# Altium PCB PCB_CPU_1.PcbDoc
Units mm, origin at the board's own origin, x right, y up, seen from the top; angles counter-clockwise.
Board outline 195 x 54.5 mm, 2 copper layers (Top Layer, Bottom Layer); 53 components, 42 nets, 196 pads, 3 vias.
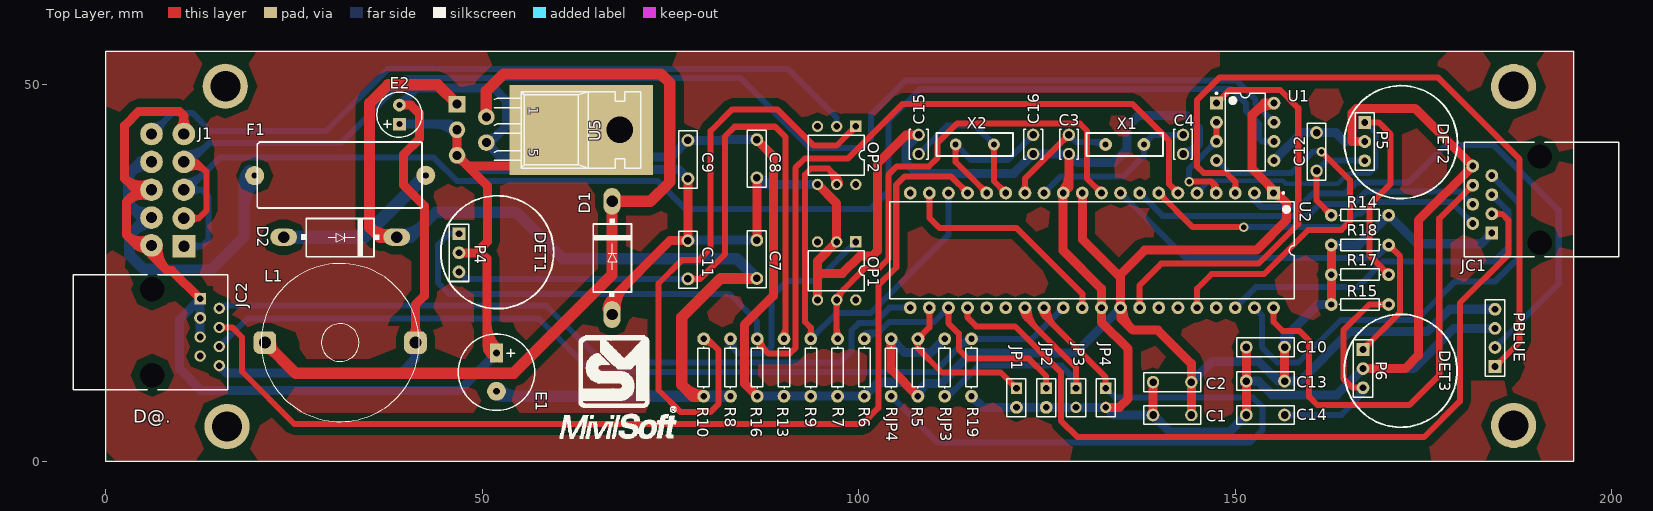
[diagram p0: Top Layer view]
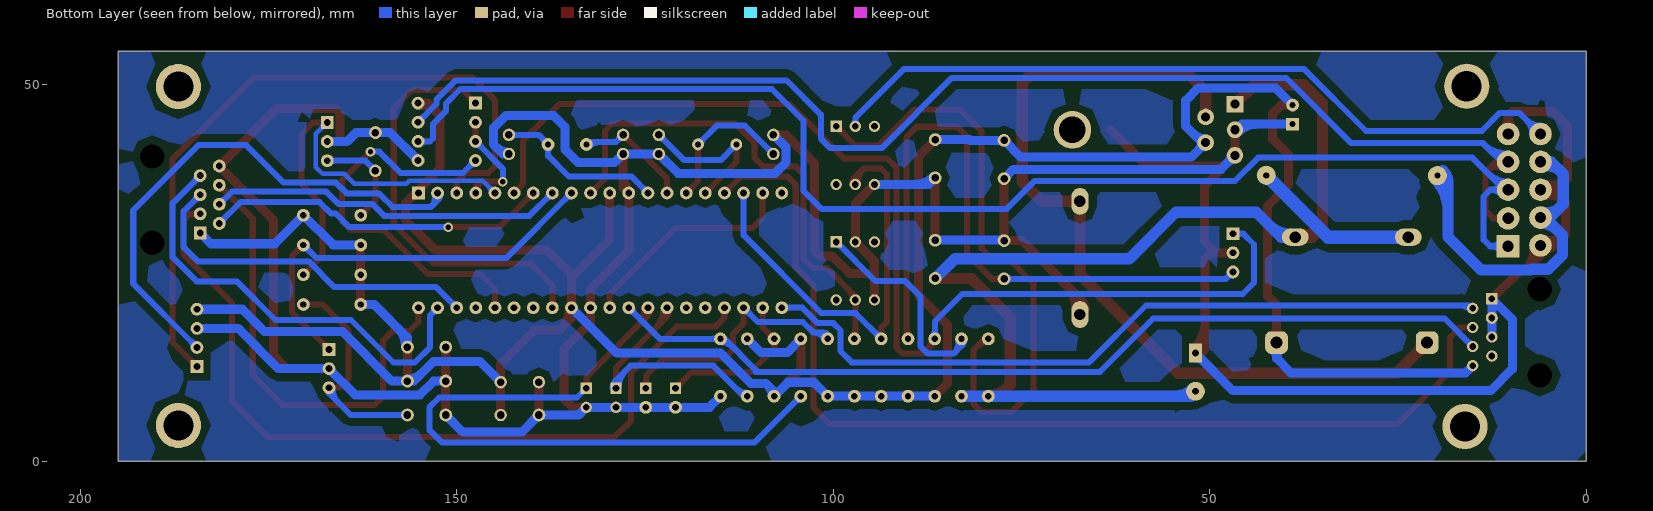
[diagram p1: Bottom Layer view, seen from below]

## Layer stack, top to bottom
Top Solder: solder mask 0.0102, Solder Resist, Dk 3.5
Top Layer: signal copper 0.0356
Dielectric 1: dielectric 0.32, FR-4, Dk 4.8
Bottom Layer: signal copper 0.0356
Bottom Solder: solder mask 0.0102, Solder Resist, Dk 3.5

## Board outline
0,0 0,54.5 195,54.5 195,0

## Design rules (kind name [scope] priority, off if disabled: settings)
Clearance "POLIGONO TOP BOTTON" [(InNamedPolygon('GND BOTTON'))] p1: gap=1
Clearance "POLIGONO TOP LAYER" [(InNamedPolygon('GND TOP'))] p2: gap=1
Clearance [All] p3: gap=0.254
PolygonConnect [All] p1: connectstyle=Relief reliefconductorwidth=0.254 reliefentries=4 polygonreliefangle="90 Angle" airgapwidth=0.254
RoomDefinition U_MDL_RECEPTOR_IRF_2 [InComponentClass('U_MDL_RECEPTOR_IRF_2')] p1: confinementstyle=ConfineIn formatcopy=TRUE lockcomponents=FALSE outline 180,0.05 136.725,0.05 136.725,53.775 180,53.775
RoomDefinition U_MDL_RECEPTOR_IRF_1 [InComponentClass('U_MDL_RECEPTOR_IRF_1')] p2: confinementstyle=ConfineIn formatcopy=TRUE lockcomponents=FALSE outline 180,53.775 136,53.775 136,0.775 180,0.775
RoomDefinition U_MDL_RECEPTOR_IRF [InComponentClass('U_MDL_RECEPTOR_IRF')] p3: confinementstyle=ConfineIn formatcopy=TRUE lockcomponents=FALSE outline 92.225,53.775 30,53.775 30,0 92.225,0
RoomDefinition U_MDL_FUENTE_5V [InComponentClass('U_MDL_FUENTE_5V')] p4: confinementstyle=ConfineIn formatcopy=TRUE lockcomponents=FALSE outline 0.3,0 91,0 91,54.5 0.3,54.5
RoomDefinition U_MDL_CONTROL [InComponentClass('U_MDL_CONTROL')] p5: confinementstyle=ConfineIn formatcopy=TRUE lockcomponents=FALSE outline 74,54.5 194,54.5 194,-0.025 74,-0.025
RoomDefinition U_MDL-485 [InComponentClass('U_MDL-485')] p6: confinementstyle=ConfineIn formatcopy=TRUE lockcomponents=FALSE outline 145,34.775 165,34.775 165,50.775 145,50.775
RoutingLayers RoutingLayers_1 [All] p1: top layer_v5=TRUE bottom layer_v5=TRUE
RoutingLayers [InNetClass('PRB[0..5]')] p2: top layer_v5=FALSE bottom layer_v5=TRUE
RoutingVias [All] p1: holewidth=0.711 width=1.27 viastyle="Through Hole" minholewidth=0.711 minwidth=1.27 maxholewidth=0.711 maxwidth=1.27
SolderMaskExpansion [All] p1: expansion=0.102
Width "Schematic Width Constraint_5" [InNet('VCC_IN')] p1: maxlimit=2 minlimit=1.2 preferedwidth=1.5
Width "Schematic Width Constraint_4" [InNet('NetD2_1')] p2: maxlimit=2 minlimit=1.2 preferedwidth=1.8
Width "Schematic Width Constraint_3" [InNet('24VCC')] p3: maxlimit=2 minlimit=1.2 preferedwidth=1.5
Width "Schematic Width Constraint_2" [InNet('NetD1_2')] p4: maxlimit=1.5 minlimit=0.8 preferedwidth=1.5
Width "Schematic Width Constraint_1" [InNet('5VCC')] p5: maxlimit=1.5 minlimit=0.8 preferedwidth=1.2
Width "Schematic Width Constraint" [InNet('GND')] p6: maxlimit=1.5 minlimit=0.8 preferedwidth=1.2
Width ALL [All] p7: maxlimit=2 minlimit=0.5 preferedwidth=0.8
28 further rules are at their usual default settings.

## Classes and differential pairs
component class U_MDL_RECEPTOR_IRF_2: C13 C14 P6 R15 R18
component class U_MDL_RECEPTOR_IRF_1: C10 C12 P5 R14 R17
component class U_MDL-485: C1 U1
component class U_MDL_CONTROL: C2 C3 C4 C15 C16 JC1 JC2 JP1 JP2 JP3 JP4 OP1 OP2 PBLUE R5 R6 R7 R8 R9 R10 R19 RJP3 RJP4 U2 X1 X2
component class U_MDL_FUENTE_5V: C7 C8 D1 D2 E1 E2 F1 J1 L1 U5
component class U_MDL_RECEPTOR_IRF: C9 C11 P4 R13 R16

## Components (designator, comment, footprint, x,y, rotation, side; value= is the part's Value field where it differs from the comment)
C1 "VP44BY224JB" VP44-2.5#1 141.647,6.15 r180 top
C2 "VP44BY224JB" VP44-2.5#2 141.647,10.519 r180 top
C3 "VP31BA220JB" VP31-2.5 127.935,42.091 r270 top
C4 "VP31BA220JB" VP31-2.5 143.099,42.091 r90 top
C7 "VP44BY224JB" VP44-2.5#3 86.481,26.831 r90 top
C8 "VP44BY224JB" VP44-2.5#3 86.481,40.192 r90 top
C9 "VP44BY224JB" VP44-2.5#3 77.328,40.09 r90 top
C10 "VP44BY224JB" VP44-2.5#3 154.033,15.167 r0 top
C11 "VP44BY224JB" VP44-2.5#3 77.328,26.775 r90 top
C12 "VP44BY224JB" VP44-2.5#1 160.828,41.126 r90 top
C13 "VP44BY224JB" VP44-2.5#3 154.033,10.659 r0 top
C14 "VP44BY224JB" VP44-2.5#3 154.033,6.15 r180 top
C15 "VP31BA220JB" VP31-2.5 107.971,42.091 r90 top
C16 "VP31BA220JB" VP31-2.5 123.185,42.091 r90 top
D1 "Diodo" 1N4000 67.25,34.525 r270 top
D2 "Diodo" 1N4000 38.65,29.775 r180 top
E1 "Cap Pol1" C1000UF 51.9,14.375 r270 top
E2 "Cap2" C1UF 39,44.775 r90 top
F1 "Fuse 1" FUSIBLE_BUSMATIC -1223.915,-1224.234 r180 top
J1 "Header 5X2" PCBComponent_1 -1243.426,1276.775 r90 top
JC1 "RJ45" 15-43-6233#1 201,34.775 r90 top
JC2 "RJ45" 15-43-6233#2 -4.35,17.149 r270 top
JP1 "Header 2" HDR1X2#1 120.964,9.71 r270 top
JP2 "Header 2" HDR1X2#1 124.918,9.71 r270 top
JP3 "Header 2" HDR1X2#2 128.872,9.71 r270 top
JP4 "Header 2" HDR1X2#2 132.826,9.71 r270 top
L1 "Inductor Adj" Inductor_redondo 31.138,15.775 r0 top
OP1 "4N33" 4n35_4n33_6pines 97,25.429 r180 top
OP2 "4N33" 4n35_4n33_6pines 97,40.775 r180 top
P4 "Header 3" HDR1X3 46.92,30.235 r270 top
P5 "Header 3" HDR1X3 167.229,45.012 r270 top
P6 "Header 3" HDR1X3 167,14.855 r270 top
PBLUE "Header 4" HDR1X4 184.526,12.577 r90 top
R5 "Res" AXIAL-0.3#1 107.877,12.46 r270 top
R6 "Res" AXIAL-0.3#1 100.763,12.46 r270 top
R7 "Res" AXIAL-0.3#2 97.205,12.46 r270 top
R8 "Res" AXIAL-0.3#2 82.977,12.46 r90 top
R9 "Res" AXIAL-0.3#2 93.648,12.46 r270 top
R10 "Res" AXIAL-0.3#2 79.42,12.46 r90 top
R13 "Res" AXIAL-0.3#1 90.091,12.46 r90 top
R14 "Res" AXIAL-0.3#1 166.594,32.693 r180 top
R15 "Res" AXIAL-0.3#1 166.594,20.832 r0 top
R16 "Res" AXIAL-0.3#1 86.534,12.46 r270 top
R17 "Res" AXIAL-0.3#1 166.594,24.786 r180 top
R18 "Res" AXIAL-0.3#1 166.594,28.74 r180 top
R19 "Res" AXIAL-0.3#1 114.991,12.46 r270 top
RJP3 "Res" AXIAL-0.3#2 111.434,12.46 r90 top
RJP4 "Res" AXIAL-0.3#2 104.32,12.46 r90 top
U1 "DS3695N" N08E 151.354,43.768 r0 top
U2 "PIC18F4620-I/P" PDIP600-P40 130.983,28.02 r270 top
U5 "LM2596T-5.0" FP_LM2596_D_PCB 68.25,44.025 r270 top
X1 "20Mhz" XTAL-1#1 132.812,42.091 r0 top
X2 "20Mhz" XTAL-1#2 117.978,42.091 r180 top

## Footprints (in the part's own frame and the unit in brackets; to place one, negate y for a bottom-side part, rotate by r counter-clockwise, add the part's x,y. Pads: shape width x height; smd on the part's side, far side on the other; paste and mask are expansions set on the pad)
1N4000 [mil] "Diodo Rectificador de proposito general"
  oval 140x90 hole 60: 1(591.54,0) 2(0,0)
  silkscreen extent 90,-98 500,102, body extent -27,-102 615,106, height 183
4n35_4n33_6pines [mm] "optoacoplador"
  rect 1.5x1.5 hole 0.9: 1(-2.628,-3.717)
  round 1.5 hole 0.9: 2(-0.088,-3.717) 3(2.452,-3.717) 6(-2.628,3.988) 7(-0.088,3.988) 8(2.452,3.988)
  silkscreen extent -3.72,-2.55 3.7,2.75
15-43-6233#1 [mm] "Connector; PCB Jack, Thru-Hole; 1-Port; Unshielded without Lightpipes; Right Angle"
  rect 1.7x1.7 hole 0.9 paste+0: 1(-4.445,16.89)
  round 1.7 hole 0.9 paste+0: 2(-3.175,19.43) 3(-1.905,16.89) 4(-0.635,19.43) 5(0.635,16.89) 6(1.905,19.43) 7(3.175,16.89) 8(4.445,19.43)
  round 2.95 hole 3.25 unplated: MH1(-5.715,10.54) MH2(5.715,10.54)
  silkscreen extent -7.62,0 7.62,20.58
15-43-6233#2 [mm] "Connector; PCB Jack, Thru-Hole; 1-Port; Unshielded without Lightpipes; Right Angle"
  rect 1.5x1.5 hole 0.9: 1(-4.445,16.89)
  round 1.5 hole 0.9: 2(-3.175,19.43) 4(-0.635,19.43) 5(0.635,16.89) 6(1.905,19.43) 7(3.175,16.89) 8(4.445,19.43)
  round 1.6 hole 0.9: 3(-1.905,16.89)
  round 2.95 hole 3.25 unplated: MH1(-5.715,10.54) MH2(5.715,10.54)
  silkscreen extent -7.62,0 7.62,20.58
AXIAL-0.3#1 [mm] "Axial Device, Thru-Hole; 2 Leads; 0.3 in Pin Spacing"
  round 1.7 hole 0.85 paste+0: 1(-3.81,0) 2(3.81,0)
  silkscreen extent -2.77,-0.76 2.77,0.76
AXIAL-0.3#2 [mm] "Axial Device, Thru-Hole; 2 Leads; 0.3 in Pin Spacing"
  round 1.7 hole 0.85: 1(-3.81,0) 2(3.81,0)
  silkscreen extent -2.77,-0.76 2.77,0.76
C1UF [mm]
  rect 1.7x1.7 hole 0.8 paste+0: 1(0,0)
  round 1.7 hole 0.8 paste+0: 2(2.54,0)
  silkscreen extent -1.73,-3 4.27,3
C1000UF [mm]
  rect 2.5x1.7 hole 0.9: 1(0,0)
  round 2.5 hole 0.9 paste+0: 2(5.08,0)
  silkscreen extent -2.54,-5.08 7.62,5.08
FP_LM2596_D_PCB [mm] "Fotprint LM2596 disipa calor en el PCB"
  round 5 hole 3.5: 0(0,0)
  rect 12x19 smd: 0(0.008,-5.089)
  rect 2.2x2.2 hole 1.2: 1(-3.416,-21.597)
  round 2.2 hole 1.2: 2(-1.716,-17.697) 3(-0.016,-21.597) 4(1.684,-17.697) 5(3.384,-21.597)
  silkscreen extent -5.08,-16.62 5.08,2.79
FUSIBLE_BUSMATIC [mil]
  round 100 hole 31.5: 1(-49859,-49694) 2(-48964,-49692)
  silkscreen extent -49840,-49868 -48978,-49523
HDR1X2#1 [mm] "Connector; Header; 2 Position"
  rect 1.5x1.5 hole 0.9: 1(0,0)
  round 1.7 hole 0.9 paste+0: 2(2.54,0)
  silkscreen extent -1.27,-1.27 3.81,1.27
HDR1X2#2 [mm] "Connector; Header; 2 Position"
  rect 1.5x1.5 hole 0.9: 1(0,0)
  round 1.5 hole 0.9: 2(2.54,0)
  silkscreen extent -1.27,-1.27 3.81,1.27
HDR1X3 [mm] "Connector; Header; 3 Position"
  rect 1.7x1.7 hole 0.9 paste+0: 1(0,0)
  round 1.7 hole 0.9 paste+0: 2(2.54,0) 3(5.08,0)
  silkscreen extent -1.27,-1.27 6.35,1.27
HDR1X4 [mm] "Connector; Header; 4 Position"
  rect 1.7x1.7 hole 0.9 paste+0: 1(0,0)
  round 1.7 hole 0.9 paste+0: 2(2.54,0) 3(5.08,0) 4(7.62,0)
  silkscreen extent -1.27,-1.27 8.89,1.27
Inductor_redondo [mm]
  rrect50% 3x3 hole 1.6: 1(10,0) 2(-10,0)
  silkscreen extent -10.5,-10.5 10.5,10.5
N08E [mm] "DIP, 8-Leads, Row Spacing 7.62mm, Pitch 2.54mm, Body 9.91x6.35mm"
  rect 1.7x1.7 hole 0.9 paste+0: 1(-3.81,3.81)
  round 1.7 hole 0.9 paste+0: 2(-3.81,1.27) 3(-3.81,-1.27) 4(-3.81,-3.81) 5(3.81,-3.81) 6(3.81,-1.27) 7(3.81,1.27) 8(3.81,3.81)
  silkscreen extent -3.93,-5.15 2.65,5.23, body extent -3.6,-5.15 3.6,5.15, height 5.34
PCBComponent_1 [mm]
  rect 3x3 hole 1.5: 1(-1248.217,-1253.823)
  round 3 hole 1.5: 2(-1248.1,-1249.5) 3(-1244.5,-1253.8) 4(-1244.4,-1249.5) 5(-1240.7,-1253.8) 6(-1240.7,-1249.5) 7(-1237,-1253.8) 8(-1237,-1249.5) 9(-1233.3,-1253.8) 10(-1233.3,-1249.5)
PDIP600-P40 [mm] "DIP, 40-Leads, Row Spacing 15.24mm, Pitch 2.54mm, Body 51.8x13.5mm"
  rect 1.7x1.7 hole 0.9 paste+0: 1(-7.62,24.13)
  round 1.7 hole 0.9 paste+0: 2(-7.62,21.59) 3(-7.62,19.05) 4(-7.62,16.51) 5(-7.62,13.97) 6(-7.62,11.43) 7(-7.62,8.89) 8(-7.62,6.35) 9(-7.62,3.81) 10(-7.62,1.27) 11(-7.62,-1.27) 12(-7.62,-3.81) 13(-7.62,-6.35) 14(-7.62,-8.89) 15(-7.62,-11.43) 16(-7.62,-13.97) 17(-7.62,-16.51) 18(-7.62,-19.05) 19(-7.62,-21.59) 20(-7.62,-24.13) 21(7.62,-24.13) 22(7.62,-21.59) 23(7.62,-19.05) 24(7.62,-16.51) 25(7.62,-13.97) 26(7.62,-11.43) 27(7.62,-8.89) 28(7.62,-6.35) 29(7.62,-3.81) 30(7.62,-1.27) 31(7.62,1.27) 32(7.62,3.81) 33(7.62,6.35) 34(7.62,8.89) 35(7.62,11.43) 36(7.62,13.97) 37(7.62,16.51) 38(7.62,19.05) 39(7.62,21.59) 40(7.62,24.13)
  silkscreen extent -7.74,-26.85 6.45,26.85, body extent -7.3,-26.85 7.3,26.85, height 6.35
VP31-2.5 [mm] "Capacitor, Ceramic, Thru-Hole, Dipped Radial; Body 4 x 2.5 mm (WxT) Pin Spacing 2.54 mm (typ)"
  round 1.65 hole 1: 1(-1.27,0) 2(1.27,0)
  silkscreen extent -2,-1.25 2,1.25
VP44-2.5#1 [mm] "Capacitor, Ceramic, Thru-Hole, Dipped Radial; Body 7.6 x 2.5 mm (WxT) Pin Spacing 5.08 mm (typ)"
  round 1.65 hole 1: 1(-2.54,0)
  round 1.7 hole 1 paste+0: 2(2.54,0)
  silkscreen extent -3.8,-1.25 3.8,1.25
VP44-2.5#2 [mm] "Capacitor, Ceramic, Thru-Hole, Dipped Radial; Body 7.6 x 2.5 mm (WxT) Pin Spacing 5.08 mm (typ)"
  round 1.65 hole 1: 1(-2.54,0) 2(2.54,0)
  silkscreen extent -3.8,-1.25 3.8,1.25
VP44-2.5#3 [mm] "Capacitor, Ceramic, Thru-Hole, Dipped Radial; Body 7.6 x 2.5 mm (WxT) Pin Spacing 5.08 mm (typ)"
  round 1.7 hole 1 paste+0: 1(-2.54,0) 2(2.54,0)
  silkscreen extent -3.8,-1.25 3.8,1.25
XTAL-1#1 [mm]
  round 1.7 hole 0.8 paste+0: 1(0,0) 2(5.08,0)
  silkscreen extent -2.54,-1.52 7.62,1.52
XTAL-1#2 [mm]
  round 1.575 hole 0.8: 1(0,0) 2(5.08,0)
  silkscreen extent -2.54,-1.52 7.62,1.52

## Part data
C1 C2 C7 C8 C9 C10 C11 C12 C13 C14: "Dipped Radial Multilayer Ceramic Capacitor X7R: 220nF, 100V"
C3 C4 C15 C16: "Dipped Radial Multilayer Ceramic Capacitor COG (NPO): 22pF, 100V"
D1 D2: "Diodo rectificador"
E1: "Polarized Capacitor (Radial)"
E2: "Capacitor"
F1: "Fuse"
J1: "Header, 5-Pin, Dual row"
JC1 JC2: library part 15-43-6233, "Right Angle, Standard Profile, RJ45-Keyed, Flange Mount PCB Jack"
JP1 JP2 JP3 JP4: "Header, 2-Pin"
L1: "Adjustable Inductor"
OP1 OP2: library part ILD74, "Optocoupler, Phototransistor Output, Dual Channel, TTL Compatible, Pb-free"
P4 P5 P6: "Header, 3-Pin"
PBLUE: "Header, 4-Pin"
R5 R6 R7 R8 R9 R10 R13 R14 R15 R16 R17 R18 R19 RJP3 RJP4: library part Res1, "Resistor"
U1: "Multipoint RS485/RS422 Transceiver/Repeater"
U2: "Enhanced Flash Microcontroller with 10-Bit A/D and nanoWatt Technology, 64K Flash, 40-Pin PDIP, Industrial Temperature Range"
U5: "SIMPLE SWITCHER Power Converter 150 KHz 3A Step-Down Voltage Regulator"
X1 X2: library part "Cristal de cuarzo", "Cristal de cuarzo"

## Free pads (board coordinates)
  round 6 hole 4: 0(15.882,49.821) 0(16.11,4.626) 0(187,4.775) 0(187,49.775)

## Via types
v1: diameter 1.27, hole 0.711, Top Layer to Bottom Layer, 3 vias

## Nets (pads, with @x,y where several pads share a name; then routed paths per layer and width w, separated by ;. In a path a pad name is that pad's centre, name@x,y a point inside that pad or via, vN(x,y) a via of type N, cw(c..) or ccw(c..) an arc to the next point about the centre after c; other vN are vias at no path point)
5VCC: C1.1 C2.1 C8.2 C9.2 C10.2 C13.2 E2.2 JC1.1 JC2.8 L1.1 PBLUE.4 R5.2 R6.2 R7.2 R9.2 R13.1 R14.1 R15.1 R16.2 R17.2 R18.2 RJP3.2 RJP4.2 U1.8 U2.1 U2.11 U2.32 U5.4 | length 440.3
  Top Layer w1.2: E2.2 40.535,47.315 41.675,46.175 41.675,42.869 39.575,40.769 39.575,36.68 42.325,33.93 42.325,21.979 41.138,20.792 L1.1 ; L1.1@40.501,16.411 ccw(c38.965,17.948) 41.138,17.948 ccw(c43.31,17.948) L1.1@41.774,16.411 ; C8.2 88.675,40.538 88.675,21.974 84.826,18.125 84.826,10.358 R16.2 ; RJP4.2 104.32,12.207 R5.2 ; U2.11 129.713,29.487 134.793,24.407 U2.32 ; U2.32@134.787,20.4 U2.32 ; U2.32@134.85,19.775 134.85,19 136.425,17.425 139.75,17.425 144.187,12.988 C2.1 C1.1 ; U2.32@135.043,20.4 ccw(c138.889,20.4) 136.17,17.68 ; 152.499,46.224 cw(c155.164,43.559) U1.8@155.164,47.328 ; 154.406,36.744 cw(c153.301,35.64) U2.1@154.863,35.64 ; U2.1@155.113,35.39 cw(c155.113,33.828) 156.218,34.932 ; U1.8 153.853,47.578 152.25,45.975 152.25,38.9 156.86,34.29 156.86,32.06 152.85,28.05 138,28.05 134.793,24.843 U2.32 ; C13.2 C10.2 ; R15.1 R17.2 R18.2
  Bottom Layer w1.2: JC2.8 16.059,11.725 39.2,11.725 41.138,13.663 ; E2.2 41.285,49.6 51.52,49.6 53.2,47.92 53.2,44.525 51.016,42.341 U5.4 52.494,40.4 75.097,40.4 C9.2 81.828,42.63 81.93,42.732 C8.2 ; L1.1@40.514,15.126 cw(c39.109,13.663) 41.138,13.663 ; L1.1 41.138,13.663 ; L1.1@41.761,15.126 ccw(c43.166,13.663) 41.138,13.663 ; U5.4@50.553,41.841 cw(c50.553,40.634) 51.407,41.487 cw(c52.26,42.341) U5.4@51.053,42.341 ; U5.4@50.553,42.841 ccw(c50.553,45.166) 52.197,43.522 ; R16.2 R13.1 R9.2 R7.2 R6.2 102.613,10.5 106.027,10.5 R5.2 107.877,9.227 109.004,10.354 110.954,10.354 114.975,14.375 128.768,14.375 U2.32 ; RJP4.2 106.147,14.442 109.606,14.442 RJP3.2 ; R5.2@108.127,8.65 cw(c110.123,8.65) 108.711,10.061 ; C2.1 146.918,13.25 153.125,13.25 155.716,10.659 C13.2 158.659,10.659 165.25,17.25 175.575,17.25 178.522,20.197 PBLUE.4 ; 154.683,11.692 ccw(c156.573,13.582) C13.2@156.573,10.909 ; C10.2 156.573,16.423 160.982,20.832 R15.1 ; C10.2@156.823,15.167 cw(c160.459,15.167) 157.888,17.738 ; R18.2 166.45,28.739 R14.1 174.197,28.9 182.68,28.9 JC1.1
24VCC: C7.1 D2.2 E1.2 R8.1 R10.1 U5.1 | length 154.9
  Top Layer w1.5: 35.025,31.1 ccw(c37.398,33.473) D2.2@37.95,30.163 ; D2.2 36.35,29.775 35.025,31.1 35.025,47.55 37.477,50.002 44.092,50.002 U5.1 ; 76.868,9.807 ccw(c79.42,12.359) R10.1@79.42,8.75 ; R10.1 78.025,8.65 76.525,10.15 76.525,19.15 81.666,24.291 C7.1
  Bottom Layer w1.5: D2.2 40.525,29.775 43.85,33.1 54.5,33.1 60.687,26.913 83.859,26.913 C7.1 ; D2.2@39.285,30.168 ccw(c39.285,34.11) 42.073,31.323 ; E1.2 52.545,8.65 R10.1 R8.1 ; E1.2@52.254,9.649 ccw(c54.665,12.06) 54.665,8.65
485_DO_A: J1.1 J1.5 U1.6 | length 193.3
  Bottom Layer w0.8: J1.5@10.374,36.375 ccw(c10.374,38.309) 11.741,36.941 ; J1.5@10.374,37.175 ccw(c10.374,41.04) 13.107,38.307 ; J1.1 12.758,28.558 ; J1.5@11.218,35.37 cw(c12.725,34.113) 12.725,36.075 ; J1.5@11.218,36.78 ccw(c12.725,38.037) 12.725,36.075 ; J1.1@11.239,27.85 cw(c12.758,26.574) 12.758,28.558 ; J1.1@11.239,29.266 ccw(c12.758,30.542) 12.758,28.558 ; J1.5@11.474,36.075 cw(c12.92,36.075) 11.897,37.097 ; U1.6@154.846,42.18 ccw(c154.078,41.411) 154.078,42.498 ccw(c154.078,43.584) U1.6@154.846,42.816 ; U1.6 153.577,42.498 153.2,42.875 153.2,44.775 151.43,46.545 151.43,47.545 149.525,49.45 108.166,49.45 103.984,45.267 103.984,35.937 101.539,33.492 77.028,33.492 73.27,37.25 46.65,37.25 43.575,40.325 15.125,40.325 10.875,36.075 J1.5 12.725,36.075 ; 12.725,36.075 13.625,35.175 13.625,29.425 12.758,28.558
485_DO_B: J1.3 J1.7 U1.7 | length 190.4
  Top Layer w0.8: J1.3 12.325,32.275 ; J1.7 12.05,39.775 ; J1.7@10.52,39.513 cw(c11.369,37.991) 12.601,39.224 ; J1.7@10.91,38.814 cw(c11.905,37.03) 13.35,38.475 ; J1.3@11.315,31.706 cw(c12.325,31.095) 12.325,32.275 ; J1.3@11.315,32.844 ccw(c12.325,33.455) 12.325,32.275 ; J1.7@11.383,39.337 cw(c12.05,39.048) 12.05,39.775 ; J1.7@11.383,40.213 ccw(c12.05,40.502) 12.05,39.775 ; 12.05,39.775 13.35,38.475 ; 12.325,32.275 13.35,33.3 13.35,38.475
  Bottom Layer w0.5: U1.7 U1.7@155.164,45.211
  Bottom Layer w0.8: J1.7 11.25,39.775 13.725,42.25 ; J1.7@10.375,40.075 ccw(c10.391,42.873) 12.37,40.895 ; J1.7@10.38,40.875 ccw(c10.405,45.569) 13.725,42.25 ; U1.7@154.714,45.038 ccw(c153.628,45.038) 154.396,45.806 ccw(c155.164,46.574) U1.7@155.164,45.488 ; U1.7 152.745,47.456 152.745,48.03 150.175,50.6 106.226,50.6 101.666,46.04 101.666,42.866 100.4,41.6 93.6,41.6 84.275,50.925 39.876,50.925 31.201,42.25 13.725,42.25
ACTIVACION_COM: U2.19 U2.30 | length 33.1
  Top Layer w0.8: U2.19@109.075,35.322 cw(c108.307,34.553) 109.393,34.553 cw(c110.48,34.553) U2.19@109.711,35.322 ; U2.19 109.393,32.332 110.725,31 120.95,31 129.713,22.237 U2.30 ; U2.30@129.395,20.718 ccw(c128.627,21.486) 129.713,21.486 ccw(c130.8,21.486) U2.30@130.031,20.718
BLUE_RX: PBLUE.2 U2.2 | length 76.1
  Bottom Layer w0.8: U2.2@152.239,35.743 ccw(c153.197,35.446) 152.488,34.737 ; U2.2@152.326,35.263 cw(c151.782,34.433) 152.775,34.433 ; U2.2 152.775,35.438 152.775,34.45 153.425,33.8 ; U2.2@153.003,35.507 ccw(c154.628,35.003) 153.425,33.8 ; PBLUE.2 193,23.59 193,33.35 184.35,42 177.992,42 173.017,37.025 166.083,37.025 164.658,35.6 160.365,35.6 158.565,33.8 153.425,33.8 ; PBLUE.2@184.526,15.567 ccw(c184.526,16.653) 185.295,15.885 ccw(c186.063,15.117) PBLUE.2@184.976,15.117
BLUE_TX: PBLUE.1 U2.3 | length 97.1
  Top Layer w0.8: U2.3@149.715,35.958 ccw(c148.947,36.726) 150.033,36.726 ccw(c151.12,36.726) U2.3@150.351,35.958 ; U2.3 150.033,37.117 148.85,38.3 145.825,38.3 144.973,39.152 144.973,48.021 147.945,50.993 176.926,50.993 187.8,40.119 187.8,15.85 PBLUE.1 ; PBLUE.1@184.526,13.027 ccw(c184.526,14.113) 185.295,13.345 ccw(c186.063,12.577) PBLUE.1@184.976,12.577
BUZZER: JC2.2 U2.21 | length 103.1
  Bottom Layer w0.8: JC2.2 15.456,20.7 58.476,20.7 66.026,13.15 97.575,13.15 99.05,14.625 99.05,17.4 100,18.35 102.075,18.35 104.125,20.4 U2.21 ; JC2.2@15.328,20.076 cw(c16.834,18.57) 16.834,20.7 ; U2.21@106.535,20.082 ccw(c105.767,19.313) 105.767,20.4 ccw(c105.767,21.486) U2.21@106.535,20.718
DET_1: P4.1 R16.1 U2.6 | length 155.2
  Top Layer w0.8: R16.1 86.534,15.791 88.01,14.315 90.89,14.315 91.607,15.032 91.607,38.982 92.875,40.25 98.619,40.25 105.806,47.437 136.388,47.437 141.239,42.585 141.239,36.814 U2.6 ; R16.1@86.984,16.27 ccw(c89.227,16.27) 87.641,14.684 ; U2.6@141.963,35.64 ccw(c140.877,35.64) 141.645,36.408 ccw(c142.413,37.176) U2.6@142.413,36.09
  Bottom Layer w0.8: P4.1@46.602,29.917 ccw(c45.834,29.149) 45.834,30.235 ccw(c45.834,31.321) P4.1@46.602,30.553 ; P4.1 45.56,30.235 44.125,28.8 44.125,23.725 45.625,22.225 82.875,22.225 86.534,18.566 R16.1 ; R16.1@86.216,16.588 ccw(c85.448,17.356) 86.534,17.356 ccw(c87.621,17.356) R16.1@86.852,16.588
DET_2: P5.1 R17.1 U2.5 | length 62.9
  Top Layer w0.8: P5.1 169.088,45.012 170.675,43.425 170.675,36.85 167.875,34.05 167.875,27.315 R17.1 ; R17.1@169.954,24.786 ccw(c168.868,24.786) 169.636,25.554 ccw(c170.404,26.322) R17.1@170.404,25.236
  Bottom Layer w0.6: U2.5 146.563,37.25 156.353,37.25 156.753,36.85 163.65,36.85 164.991,38.191 167.858,38.191 168.747,39.08 168.747,43.494 P5.1 ; U2.5@144.953,36.19 ccw(c144.953,37.518) 145.892,36.579 ccw(c146.831,35.64) U2.5@145.503,35.64 ; P5.1@167.229,44.462 cw(c167.229,43.135) 168.168,44.073 cw(c169.107,45.012) P5.1@167.779,45.012
DET_3: P6.1 R18.1 U2.9 | length 63.3
  Top Layer w0.8: P6.1 171.922,19.777 171.922,27.221 R18.1 ; P6.1@167,15.305 ccw(c167,16.391) 167.768,15.623 ccw(c168.536,14.855) P6.1@167.45,14.855 ; R18.1@170.404,28.289 cw(c170.404,27.203) 171.172,27.971 cw(c171.94,28.739) R18.1@170.854,28.739
  Bottom Layer w0.8: U2.9@134.793,35.19 cw(c134.793,34.103) 135.561,34.872 cw(c136.33,35.64) U2.9@135.243,35.64 ; U2.9 143.458,26.975 168.634,26.975 170.399,28.739 R18.1 ; 169.627,27.968 cw(c170.404,27.191) R18.1@170.404,28.289 ; 169.64,27.98 ccw(c168.88,28.739) R18.1@169.954,28.739
DET_4: JC1.7 U2.39 | length 62.2
  Bottom Layer w0.8: U2.39@152.573,19.95 cw(c152.573,18.863) 153.341,19.632 cw(c154.11,20.4) U2.39@153.023,20.4 ; U2.39 153.575,19.398 153.575,15.175 155.625,13.125 158.425,13.125 164.075,18.775 174.1,18.775 179.241,23.916 184.571,23.916 187.775,27.12 187.775,34.285 JC1.7 ; JC1.7@184.11,37.5 cw(c184.11,36.414) 184.878,37.182 cw(c185.646,37.95) JC1.7@184.56,37.95
DET_5: JC1.6 U2.40 | length 65
  Top Layer w0.8: U2.40@154.795,20.082 cw(c154.027,19.313) 155.113,19.313 cw(c156.2,19.313) U2.40@155.431,20.082 ; U2.40 155.113,18.512 156.3,17.325 158.55,17.325 159.85,16.025 159.85,8.55 160.95,7.45 173.125,7.45 177.125,11.45 177.125,32.235 JC1.6 ; JC1.6@181.12,36.68 cw(c180.034,36.68) 180.802,35.912 cw(c181.57,35.144) JC1.6@181.57,36.23
DET_6: JC1.5 U2.38 | length 50.9
  Bottom Layer w0.8: U2.38 152.758,23.125 166.275,23.125 169.7,26.55 184.425,26.55 186.3,28.425 186.3,33.22 JC1.5 ; U2.38@150.033,20.85 ccw(c150.033,21.936) 150.801,21.168 ccw(c151.57,20.4) U2.38@150.483,20.4 ; JC1.5@184.11,34.96 cw(c184.11,33.874) 184.878,34.642 cw(c185.646,35.41) JC1.5@184.56,35.41
DI_485: U1.4 U2.36 | length 56.6
  Top Layer w0.8: U2.36@144.635,20.718 ccw(c143.867,21.486) 144.953,21.486 ccw(c146.04,21.486) U2.36@145.271,20.718 ; U2.36 144.953,22.928 146.901,24.876 153.856,24.876 159.705,30.725 164.125,30.725 165.275,31.875 165.275,37.345 v1(161.483,41.137)
  Bottom Layer w0.8: U1.4@147.544,39.508 cw(c147.544,38.421) 148.312,39.19 cw(c149.08,39.958) U1.4@147.994,39.958 ; U1.4 149.198,38.304 156.79,38.304 156.794,38.3 157.477,38.3 160.314,41.137 v1(161.483,41.137)
GND: C1.2 C2.2 C3.2 C4.1 C7.2 C8.1 C9.1 C10.1 C11.2 C12.2 C13.1 C14.2 C15.2 C16.1 D1.1 E1.1 E2.1 J1.2 J1.6 J1.9 JC1.8 JC2.1 JC2.3 JC2.5 JP1.2 JP2.2 JP3.2 JP4.2 OP1.2 OP1.8 OP2.8 P4.2 P5.2 P6.2 PBLUE.3 R19.2 U1.5 U2.12 U2.31 U5.0 U5.3 U5.5 | length 622.2
  Top Layer w1.2: 3.787,36.288 ccw(c5.359,37.861) J1.6@6.185,35.796 ; 4.004,28.821 ccw(c5.41,30.227) J1.2@6.192,28.399 ; 4.163,35.863 cw(c5.578,34.449) J1.6@6.161,36.362 ; 4.263,35.925 cw(c4.263,34.264) J1.6@5.437,35.439 ; J1.6@5.317,36.562 cw(c4.15,37.312) 4.15,35.925 ; J1.6@5.329,35.569 ccw(c4.375,34.922) 4.375,36.075 ; J1.6@5.329,36.58 cw(c4.375,37.228) 4.375,36.075 ; J1.2@5.383,28.098 ccw(c4.15,27.069) 4.15,28.675 ; J1.2@5.383,29.252 cw(c4.15,30.281) 4.15,28.675 ; J1.2@5.72,29.502 cw(c4.658,31.983) 2.75,30.075 ; J1.6@5.739,36.911 cw(c4.623,39.698) 2.5,37.575 ; J1.2@5.775,28.7 ccw(c7.708,28.536) 6.336,27.164 ; J1.6@5.811,35.214 ccw(c4.917,32.283) 2.75,34.45 ; J1.2@6.971,28.599 ccw(c11.072,28.249) 8.161,25.339 ; J1.9@9.737,44.111 ccw(c8.201,45.648) 10.374,45.648 ccw(c12.547,45.648) J1.9@11.01,44.111 ; J1.9 10.374,45.876 9.775,46.475 4.375,46.475 2.5,44.6 2.5,37.575 ; JC2.1 8.795,25.339 8.161,25.339 ; U5.5@46.299,40.995 ccw(c45.446,41.848) 46.653,41.848 ccw(c47.86,41.848) U5.5@47.007,40.995 ; U5.3@46.299,43.687 cw(c45.446,42.834) 46.653,42.834 cw(c47.86,42.834) U5.3@47.007,43.687 ; U5.5@46.653,40.141 cw(c46.653,38.934) 47.507,39.787 cw(c48.36,40.641) U5.5@47.153,40.641 ; U5.3 U5.5 50.7,36.594 50.7,29.175 49.22,27.695 P4.2 49.855,27.695 50.625,26.925 50.625,15.65 E1.1 ; 48.4,39.225 58.369,39.225 U5.0@63.161,44.017 ; 50.625,15.56 ccw(c52.685,15.56) E1.1@51.228,14.103 ; 50.625,18.457 ccw(c55.582,18.457) E1.1@52.077,14.952 ; 50.79,15.485 ccw(c51.9,16.594) E1.1@51.9,15.025 ; D1.1@66.593,20.135 cw(c68.604,20.135) 67.182,21.557 ; D1.1@66.866,20.519 ccw(c65.939,21.446) 67.25,21.446 ccw(c68.561,21.446) D1.1@67.634,20.519 ; D1.1 67.25,21.625 74.94,29.315 C11.2 C9.1 ; D1.1@67.793,20.135 cw(c72.701,20.135) 69.231,23.606 ; C7.2 C8.1 ; OP1.8 94.548,24.8 ; OP2.8 97.088,34.247 OP1.2 94.548,26.606 94.548,24.8 ; C15.2 106.311,43.361 102.5,39.55 102.5,27.95 101.85,27.3 100.2,27.3 97.85,24.95 94.698,24.95 94.548,24.8 ; U2.12@126.996,35.817 ccw(c124.73,38.083) 127.935,38.083 ; C3.2 127.935,36.402 U2.12 127.173,28.002 132.253,22.922 U2.31 132.253,18.486 135.8,14.939 135.8,8.325 134.645,7.17 JP4.2 ; C1.2 C2.2 ; C14.2 C13.1 C10.1 ; P6.2 172.59,12.315 174.35,14.075 174.35,32 JC1.8 173.927,46.863 166.142,46.863 165.521,46.243 165.521,42.472 P5.2 ; 2.5,37.575 4.15,35.925 ; 2.75,30.075 4.15,28.675 ; 2.75,30.075 2.75,34.45 ; 2.75,34.45 4.375,36.075 ; 4.15,28.675 J1.2 6.074,27.426 8.161,25.339 ; 4.15,35.925 5.924,35.925 J1.6 4.375,36.075
  Bottom Layer w1.2: JC2.5 JC2.3 JC2.1 9.8,18.854 9.8,12.275 12.675,9.4 46.925,9.4 E1.1 ; E2.1 45.75,44.775 U5.3@46.175,44.35 ; 43.674,44.775 cw(c43.674,41.062) U5.3@46.299,43.687 ; U5.5@46.653,40.141 cw(c46.653,38.934) 47.507,39.787 cw(c48.36,40.641) U5.5@47.153,40.641 ; U5.5 48.519,38.775 76.103,38.775 C9.1 ; 50.79,13.265 cw(c51.9,12.156) E1.1@51.9,13.725 ; C11.2 77.384,29.371 C7.2 ; C8.1 87.346,36.787 OP2.8 ; C8.1@86.658,37.829 ccw(c89.173,40.344) 89.173,36.787 ; C15.2 106.292,41.682 106.292,39.715 107.757,38.25 120.614,38.25 C16.1 C3.2 129.082,39.675 133.909,39.675 135.625,41.391 135.625,44.4 137.15,45.925 143.513,45.925 145.175,44.263 145.175,42.125 143.871,40.821 C4.1 ; R19.2 116.47,7.17 JP1.2 JP2.2 JP3.2 JP4.2 133.846,6.15 C1.2 141.383,3.875 149.218,3.875 C14.2 ; C4.1@143.099,41.046 ccw(c143.099,43.455) 144.802,41.752 ; C13.1 153.101,10.659 154.931,8.829 163.514,8.829 P6.2 173.74,12.315 179.082,17.657 PBLUE.3 ; U1.5 158.872,43.666 C12.2 163.413,43.666 164.607,42.472 P5.2
JUMPER_1: JP1.1 R5.1 U2.22 | length 27.8
  Top Layer w0.8: R5.1@107.558,15.952 cw(c106.79,15.184) 107.877,15.184 cw(c108.963,15.184) R5.1@108.195,15.952 ; R5.1@107.877,16.72 ccw(c107.877,17.806) 108.645,17.038 ccw(c109.413,16.27) R5.1@108.327,16.27 ; U2.22@109.075,20.082 cw(c108.307,19.313) 109.393,19.313 cw(c110.48,19.313) U2.22@109.711,20.082 ; U2.22 109.393,17.786 R5.1 107.877,14.998 111.075,11.8 118.874,11.8 JP1.1 ; JP1.1@120.614,9.71 ccw(c119.769,9.71) 120.366,10.308 ccw(c120.964,10.905) JP1.1@120.964,10.06
JUMPER_2: JP2.1 R6.1 U2.23 | length 42.6
  Top Layer w0.8: U2.23@111.615,20.082 cw(c110.847,19.313) 111.933,19.313 cw(c113.02,19.313) U2.23@112.251,20.082 ; U2.23 111.933,18.342 113.325,16.95 113.325,14.85 114.525,13.65 122.6,13.65 124.918,11.332 JP2.1 ; JP2.1@124.67,9.958 ccw(c124.073,10.555) 124.918,10.555 ccw(c125.763,10.555) JP2.1@125.165,9.958
  Bottom Layer w0.8: R6.1@100.437,16.397 cw(c101.503,15.98) 101.503,17.125 ; R6.1 100.763,16.488 101.4,17.125 ; R6.1@101.182,16.106 cw(c102.675,15.521) 102.675,17.125 ; R6.1@101.198,16.383 cw(c101.947,16.578) 101.4,17.125 ; U2.23@111.483,20.4 cw(c110.397,20.4) 111.165,19.632 cw(c111.933,18.863) U2.23@111.933,19.95 ; U2.23 110.033,18.5 104.05,18.5 102.675,17.125 ; 101.4,17.125 102.675,17.125
JUMPER_3: JP3.1 RJP3.1 U2.27 | length 49.1
  Top Layer w0.8: U2.27@121.743,20.4 ccw(c123.718,20.4) 122.322,19.003 ; U2.27@121.775,20.082 cw(c121.007,19.313) 122.093,19.313 cw(c123.18,19.313) U2.27@122.411,20.082 ; U2.27 122.093,19.232 128.872,12.453 JP3.1 ; U2.27@122.543,20.4 ccw(c126.449,20.4) 123.687,17.638 ; JP3.1@128.624,9.958 ccw(c128.027,10.555) 128.872,10.555 ccw(c129.717,10.555) JP3.1@129.119,9.958
  Bottom Layer w0.8: RJP3.1 111.9,8.65 115.95,12.7 126.95,12.7 128.872,10.778 JP3.1 ; RJP3.1@111.434,9.1 ccw(c111.434,11.312) 112.998,9.748 ; 127.519,12.131 cw(c125.099,9.71) JP3.1@128.522,9.71 ; JP3.1@128.624,9.958 ccw(c128.027,10.555) 128.872,10.555 ccw(c129.717,10.555) JP3.1@129.119,9.958 ; 128.885,10.765 cw(c127.83,9.71) JP3.1@129.322,9.71
JUMPER_4: JP4.1 RJP4.1 U2.28 | length 101.8
  Top Layer w0.8: U2.28@124.283,20.4 ccw(c125.992,20.4) 124.784,19.191 ; U2.28@124.321,20.076 cw(c123.615,19.342) 124.633,19.342 ; U2.28 124.633,19.342 ; U2.28@124.945,20.076 ccw(c125.652,19.342) 124.633,19.342 ; U2.28@125.083,20.4 ccw(c128.724,20.4) 126.15,17.825 ; JP4.1@132.578,9.958 ccw(c131.981,10.555) 132.826,10.555 ccw(c133.671,10.555) JP4.1@133.073,9.958 ; JP4.1 132.826,11.149 124.633,19.342
  Bottom Layer w0.8: RJP4.1@104.32,8.2 cw(c104.32,7.114) 105.088,7.882 cw(c105.856,8.65) RJP4.1@104.77,8.65 ; RJP4.1 110.495,2.475 151.975,2.475 153.625,4.125 153.625,7.225 152.375,8.475 134.061,8.475 JP4.1 ; JP4.1@132.826,9.36 cw(c132.826,8.515) 133.423,9.113 cw(c134.021,9.71) JP4.1@133.176,9.71
NetC3_1: C3.1 U2.14 X1.1 | length 22.2
  Top Layer w0.8: U2.14@121.775,35.958 ccw(c121.007,36.726) 122.093,36.726 ccw(c123.18,36.726) U2.14@122.411,35.958 ; U2.14 122.093,37.519 C3.1 ; C3.1@127.51,43.361 cw(c126.484,43.361) 127.21,42.636 cw(c127.935,41.91) C3.1@127.935,42.936
  Bottom Layer w0.8: C3.1@127.935,42.936 cw(c127.935,41.91) 128.661,42.636 cw(c129.386,43.361) C3.1@128.36,43.361 ; C3.1 128.872,42.425 132.478,42.425 X1.1 ; 130.92,42.425 cw(c130.92,40.2) X1.1@132.494,41.773
NetC4_2: C4.2 U2.13 X1.2 | length 29.3
  Bottom Layer w0.8: U2.13 126.803,37.81 135.118,37.81 137.892,40.585 X1.2 139.162,43.361 C4.2 ; U2.13@124.633,36.09 ccw(c124.633,37.176) 125.401,36.408 ccw(c126.17,35.64) U2.13@125.083,35.64 ; X1.2@137.574,41.773 cw(c136.806,41.005) 137.892,41.005 cw(c138.978,41.005) X1.2@138.21,41.773 ; X1.2@137.892,42.541 ccw(c137.892,43.628) 138.66,42.86 ccw(c139.428,42.091) X1.2@138.342,42.091 ; C4.2@142.798,43.061 ccw(c142.073,42.335) 142.073,43.361 ccw(c142.073,44.387) C4.2@142.798,43.662
NetC12_1: C12.1 P5.3 R14.2 | length 20.3
  Top Layer w0.8: C12.1@160.528,38.286 cw(c159.802,37.56) 160.828,37.56 cw(c161.854,37.56) C12.1@161.129,38.286 ; C12.1 160.828,34.649 R14.2 ; R14.2@162.334,32.693 ccw(c161.248,32.693) 162.016,33.462 ccw(c162.784,34.23) R14.2@162.784,33.143
  Bottom Layer w0.8: C12.1 162.174,39.932 P5.3 ; C12.1@160.828,39.011 ccw(c160.828,40.037) 161.554,39.312 ccw(c162.279,38.586) C12.1@161.253,38.586 ; P5.3@166.911,39.614 ccw(c166.143,38.846) 166.143,39.932 ccw(c166.143,41.019) P5.3@166.911,40.251
NetC14_1: C14.1 P6.3 R15.2 | length 33.3
  Top Layer w0.8: P6.3 165.6,9.775 164.4,10.975 164.4,17.4 167.832,20.832 R15.2
  Bottom Layer w0.8: C14.1 164.125,6.15 167,9.025 P6.3 ; C14.1@156.891,5.832 cw(c157.66,5.064) 157.66,6.15 cw(c157.66,7.237) C14.1@156.891,6.469 ; 165.701,7.726 ccw(c163.653,9.775) P6.3@166.55,9.775
NetC15_1: C15.1 U2.15 X2.1 | length 26
  Top Layer w0.8: X2.1@117.704,41.818 cw(c117.043,41.156) 117.978,41.156 cw(c118.914,41.156) X2.1@118.252,41.818 ; X2.1 117.978,37.215 U2.15 ; U2.15@119.103,35.64 ccw(c118.017,35.64) 118.785,36.408 ccw(c119.553,37.176) U2.15@119.553,36.09
  Bottom Layer w0.8: C15.1 111.736,44.587 115.483,44.587 X2.1 ; C15.1@107.971,41.246 ccw(c107.971,42.272) 108.696,41.547 ccw(c109.422,40.821) C15.1@108.396,40.821 ; X2.1@117.591,42.091 ccw(c116.656,42.091) 117.317,42.753 ccw(c117.978,43.414) X2.1@117.978,42.479
NetC16_2: C16.2 U2.16 X2.2 | length 27
  Top Layer w0.8: X2.2@112.624,41.818 cw(c111.963,41.156) 112.898,41.156 cw(c113.834,41.156) X2.2@113.172,41.818 ; X2.2 112.898,39.755 U2.16 ; U2.16@116.563,35.64 ccw(c115.477,35.64) 116.245,36.408 ccw(c117.013,37.176) U2.16@117.013,36.09
  Bottom Layer w0.8: X2.2@112.898,41.704 cw(c112.898,40.769) 113.56,41.43 cw(c114.221,42.091) X2.2@113.286,42.091 ; X2.2 114.985,40.005 119.829,40.005 C16.2 ; C16.2@122.76,43.361 cw(c121.734,43.361) 122.46,42.636 cw(c123.185,41.91) C16.2@123.185,42.936
NetD1_2: D1.2 L1.2 U5.2 | length 116.9
  Top Layer w1.5: L1.2@21.138,15.025 cw(c21.138,13.214) 22.418,14.495 cw(c23.698,15.775) L1.2@21.888,15.775 ; L1.2 25.213,11.7 54.175,11.7 67.25,24.775 D1.2 72.325,34.525 74.925,37.125 74.925,50.25 73.725,51.45 52.825,51.45 50.553,49.178 U5.2
NetD2_1: D2.1 F1.1 | length 22.3
  Bottom Layer w1.8: D2.1 34.285,29.775 F1.1
NetOP1_1: OP1.1 R8.2 | length 33.8
  Bottom Layer w0.8: R8.2@82.633,16.335 ccw(c83.695,16.133) 82.931,15.369 ; R8.2@82.693,15.921 cw(c82.206,15.323) 82.977,15.323 ; R8.2 82.977,15.323 ; R8.2@83.261,15.921 ccw(c83.748,15.323) 82.977,15.323 ; R8.2@83.419,16.186 ccw(c85.492,15.792) 84,14.3 ; OP1.1@99.278,29.146 cw(c98.433,29.146) 99.03,28.549 cw(c99.628,27.951) OP1.1@99.628,28.796 ; OP1.1 94.407,23.925 90.475,23.925 88.45,21.9 88.45,15.3 87.45,14.3 84,14.3 ; 82.977,15.323 84,14.3
NetOP2_1: OP2.1 R10.2 | length 84.5
  Top Layer w0.8: R10.2@79.42,15.82 cw(c79.42,13.562) 81.016,15.159 ; R10.2 79.905,16.27 81.375,14.8 81.375,7.6 80.343,6.568 76.332,6.568 73.425,9.475 73.425,23.625 76.525,26.725 78.75,26.725 80.325,28.3 80.325,43.85 83.225,46.75 89.2,46.75 94.025,41.925 97.061,41.925 OP2.1 ; OP2.1@99.278,44.492 cw(c98.433,44.492) 99.03,43.895 cw(c99.628,43.297) OP2.1@99.628,44.142
OPTO_ALIMENTACION: OP1.7 R7.1 U2.10 | length 71.3
  Top Layer w0.8: OP1.7@96.84,21.193 cw(c96.243,20.596) 97.088,20.596 cw(c97.933,20.596) OP1.7@97.335,21.193 ; 97.088,17.64 ccw(c98.575,17.64) R7.1@97.524,16.588 ; R7.1 97.088,16.387 OP1.7 97.088,21.888 100.894,25.694 102.769,25.694 103.946,26.871 103.946,38.046 105.075,39.175 109.35,39.175 110.454,40.279 110.454,42.255 113.04,44.84 129.403,44.84 130.342,43.901 130.342,37.551 U2.10 ; OP1.7@97.438,21.441 cw(c99.363,21.441) 98.002,22.802 ; U2.10@131.803,35.64 ccw(c130.717,35.64) 131.485,36.408 ccw(c132.253,37.176) U2.10@132.253,36.09
OPTO_PUERTA: OP2.7 R9.1 U2.18 | length 67.5
  Top Layer w0.8: R9.1@93.33,16.588 ccw(c92.562,17.356) 93.648,17.356 ccw(c94.735,17.356) R9.1@93.967,16.588 ; R9.1 93.648,17.76 92.875,18.534 92.875,38.1 93.675,38.9 95.975,38.9 ; OP2.7@96.739,36.816 ccw(c94.109,37.034) 95.975,38.9 ; OP2.7@96.84,37.034 ccw(c96.243,37.632) 97.088,37.632 ccw(c97.933,37.632) OP2.7@97.335,37.034 ; OP2.7 97.088,37.787 95.975,38.9 ; 97.195,37.68 cw(c96.363,36.847) OP2.7@97.536,36.749
  Bottom Layer w0.8: R9.1 97.078,19.7 101.615,19.7 111.933,30.018 U2.18 ; R9.1@93.648,16.72 ccw(c93.648,17.806) 94.417,17.038 ccw(c95.185,16.27) R9.1@94.098,16.27 ; U2.18@111.615,35.322 cw(c110.847,34.553) 111.933,34.553 cw(c113.02,34.553) U2.18@112.251,35.322
P_RJ45: JC2.6 R19.1 U2.29 | length 126.6
  Bottom Layer w0.8: JC2.6 18.811,18.975 57.525,18.975 64.45,12.05 ; JC2.6@15.08,15.594 ccw(c15.08,16.439) 15.678,15.841 ccw(c16.275,15.244) JC2.6@15.43,15.244 ; 64.6,11.875 110.375,11.875 ; 110.225,12.05 114.445,16.27 R19.1 123.043,16.27 U2.29 ; 113.291,15.116 cw(c114.991,13.415) R19.1@114.991,15.82 ; R19.1@115.309,15.952 cw(c116.077,15.184) 116.077,16.27 cw(c116.077,17.356) R19.1@115.309,16.588 ; U2.29@126.723,20.4 cw(c125.637,20.4) 126.405,19.632 cw(c127.173,18.863) U2.29@127.173,19.95
PUERTA: J1.10 OP2.2 | length 105.9
  Bottom Layer w0.8: J1.10 8.874,46.275 11.475,46.275 13.875,43.875 29.25,43.875 37.475,52.1 90.65,52.1 97.088,45.662 OP2.2 ; J1.10@6.074,44.575 ccw(c6.074,47.231) 7.952,45.353 ccw(c9.829,43.475) J1.10@7.174,43.475 ; OP2.2@96.84,44.74 ccw(c96.243,45.337) 97.088,45.337 ccw(c97.933,45.337) OP2.2@97.335,44.74
PWM: JC2.4 U2.17 | length 141.3
  Top Layer w0.8: JC2.4@15.08,17.42 JC2.4 16.791,17.784 18.1,16.475 18.1,11.925 25.075,4.95 100.48,4.95 102.625,7.095 102.625,23.375 105,25.75 105,36.725 106.125,37.85 112.263,37.85 U2.17 ; JC2.4@15.328,17.536 cw(c15.925,16.939) 15.925,17.784 cw(c15.925,18.629) JC2.4@15.328,18.031 ; U2.17@114.023,35.64 ccw(c112.937,35.64) 113.705,36.408 ccw(c114.473,37.176) U2.17@114.473,36.09
RE_485: U1.2 U1.3 U2.4 | length 21.9
  Top Layer w0.8: v1(143.901,37.144) 146.881,37.144 ; U2.4@147.091,35.842 ccw(c146.085,36.348) 146.881,37.144 ; U2.4@147.226,36.002 ccw(c146.834,36.532) 147.493,36.532 ccw(c148.152,36.532) U2.4@147.761,36.002 ; U1.3@147.226,42.816 ccw(c146.458,43.584) 147.544,43.584 ccw(c148.63,43.584) U1.3@147.862,42.816 ; U1.2@147.226,44.72 cw(c146.458,43.951) 147.544,43.951 cw(c148.63,43.951) U1.2@147.862,44.72 ; U2.4 147.493,36.532 146.881,37.144 ; U1.3 U1.2
  Bottom Layer w0.8: v1(143.901,37.144) 143.901,38.854 U1.3 ; U1.3@147.094,42.498 cw(c146.008,42.498) 146.776,41.73 cw(c147.544,40.961) U1.3@147.544,42.048
RGB_A: JC1.3 U2.24 | length 111.7
  Top Layer w0.8: U2.24@114.155,20.082 cw(c113.387,19.313) 114.473,19.313 cw(c115.56,19.313) U2.24@114.791,20.082 ; U2.24 114.473,19.077 115.625,17.925 120.775,17.925 126.875,11.825 126.875,5.413 129.088,3.2 175.1,3.2 179.875,7.975 179.875,21.025 186.3,27.45 186.3,32.025 185.455,32.87 JC1.3 ; JC1.3@184.428,32.552 cw(c185.196,31.784) 185.196,32.87 cw(c185.196,33.956) JC1.3@184.428,33.188
RGB_R: JC1.2 U2.7 | length 49.6
  Top Layer w0.8: U2.7@139.873,35.19 cw(c139.873,34.103) 140.641,34.872 cw(c141.41,35.64) U2.7@140.323,35.64 ; U2.7 144.409,31.104 v1(151.17,31.104)
  Bottom Layer w0.8: v1(151.17,31.104) 164.302,31.104 166.131,32.933 166.758,32.933 168.275,34.45 178.72,34.45 JC1.2 ; JC1.2@181.12,31.6 ccw(c180.034,31.6) 180.802,32.368 ccw(c181.57,33.136) JC1.2@181.57,32.05
RGB_V: JC1.4 U2.8 | length 50.9
  Bottom Layer w0.8: U2.8@137.333,35.19 cw(c137.333,34.103) 138.101,34.872 cw(c138.87,35.64) U2.8@137.783,35.64 ; U2.8 140.373,32.6 159.676,32.6 161.28,34.203 165.753,34.203 167.375,35.825 179.885,35.825 JC1.4 ; JC1.4@181.12,34.14 ccw(c180.034,34.14) 180.802,34.908 ccw(c181.57,35.676) JC1.4@181.57,34.59
RO_485: U1.1 U2.33 | length 58.8
  Top Layer w0.8: U2.33@137.015,20.718 ccw(c136.247,21.486) 137.333,21.486 ccw(c138.42,21.486) U2.33@137.651,20.718 ; U2.33 137.333,23.383 140.2,26.25 153.122,26.25 158.398,31.526 158.398,46.914 155.971,49.342 149.308,49.342 U1.1 ; U1.1@147.544,48.028 ccw(c147.544,49.114) 148.312,48.346 ccw(c149.08,47.578) U1.1@147.994,47.578
VCC_IN: F1.2 J1.4 J1.8 | length 61
  Bottom Layer w1.5: 3.546,33.679 ccw(c5.194,35.327) J1.4@5.86,33.094 ; 3.546,38.646 cw(c4.99,37.201) J1.8@5.783,39.084 ; 3.814,30.689 cw(c6.074,28.429) J1.4@6.074,31.625 ; J1.8 4.675,39.775 3.05,38.15 3.05,34.175 4.85,32.375 J1.4 5.5,32.375 3.15,30.025 3.15,27.411 5.085,25.476 5.101,25.493 7.279,25.493 7.372,25.4 13.97,25.4 18.354,29.784 18.354,36.526 F1.2 ; 18.354,33.266 cw(c24.448,33.266) F1.2@20.139,37.575 ; 18.354,35.939 cw(c19.839,35.939) F1.2@19.789,37.423 ; 18.354,36.888 cw(c20.826,36.888) F1.2@19.078,38.636
VS: C11.1 P4.3 R13.2 | length 95.3
  Top Layer w0.8: C11.1 78.96,24.235 82.25,27.525 82.25,43.159 83.53,44.439 88.911,44.439 90.3,43.05 90.3,16.479 R13.2 ; C11.1@77.646,23.917 cw(c78.414,23.149) 78.414,24.235 cw(c78.414,25.321) C11.1@77.646,24.553 ; R13.2@89.773,16.588 ccw(c88.501,17.86) 90.3,17.86
  Bottom Layer w0.8: P4.3@46.92,24.705 cw(c46.92,23.619) 47.688,24.387 cw(c48.456,25.155) P4.3@47.37,25.155 ; P4.3 47.84,24.235 C11.1 ; C11.1@77.009,23.917 ccw(c76.241,23.149) 76.241,24.235 ccw(c76.241,25.321) C11.1@77.009,24.553
pads on no net: JC1.MH1 JC1.MH2 JC2.7 JC2.MH1 JC2.MH2 OP1.3 OP1.6 OP2.3 OP2.6 U2.20 U2.25 U2.26 U2.34 U2.35 U2.37

## Polygon pours and split planes (outlines as drawn)
no net on Bottom Layer "GND BOTTON" (solid, pour order 4): 0.025,54.5 195,54.5 195,0 0,0
no net on Top Layer "GND TOP" (solid, pour order 2): 0.013,54.5 0.025,54.488 195,54.488 195,0 0,0

## Silkscreen, mask and mechanical layers (free items; w line width, h text height)
Top Overlay:
  drawing of 866 lines, arcs and shapes, not listed
  text "DET2" at 176.932,44.911 h1.52 r270
  text "DET1" at 57,30.475 h1.52 r270
  text "DET3" at 177.1,14.775 h1.52 r270
  text "D@." at 3.625,4.525 h3
Mechanical 1:
  lines w0.254: 197.734,1.578 198.242,0.054 ; 197.734,52.988 198.242,54.512 ; 197.988,0.054 198.496,0.054 ; 197.988,54.512 198.496,54.512 ; 198.242,19.259 198.242,0.054 ; 198.242,35.307 198.242,54.512 ; 198.75,1.578 198.242,0.054 ; 198.75,52.988 198.242,54.512
  text "54.458 (mm)" at 199.157,19.513 h1.52 r90

## Text inside footprints (layer, text, board x,y; h text height)
U5: Top Overlay "1" at 56.185,47.073 h1.27 r270; Top Overlay "5" at 56.185,41.485 h1.27 r270